# EAGLE board intelligent half bridge R3 with heatsink (EAGLE 5.10)
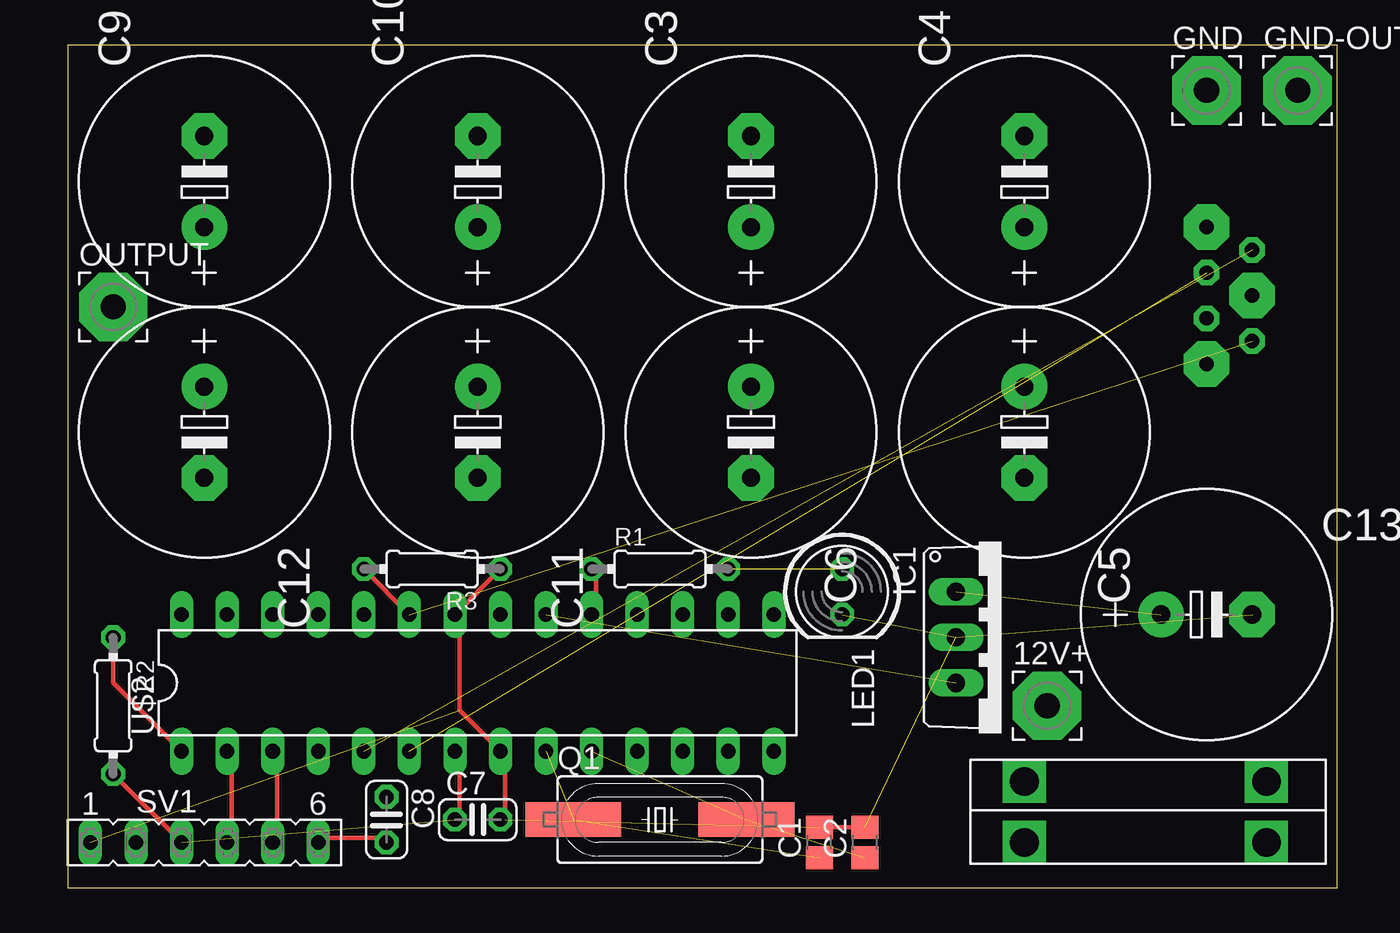
[diagram p0: board, top side]
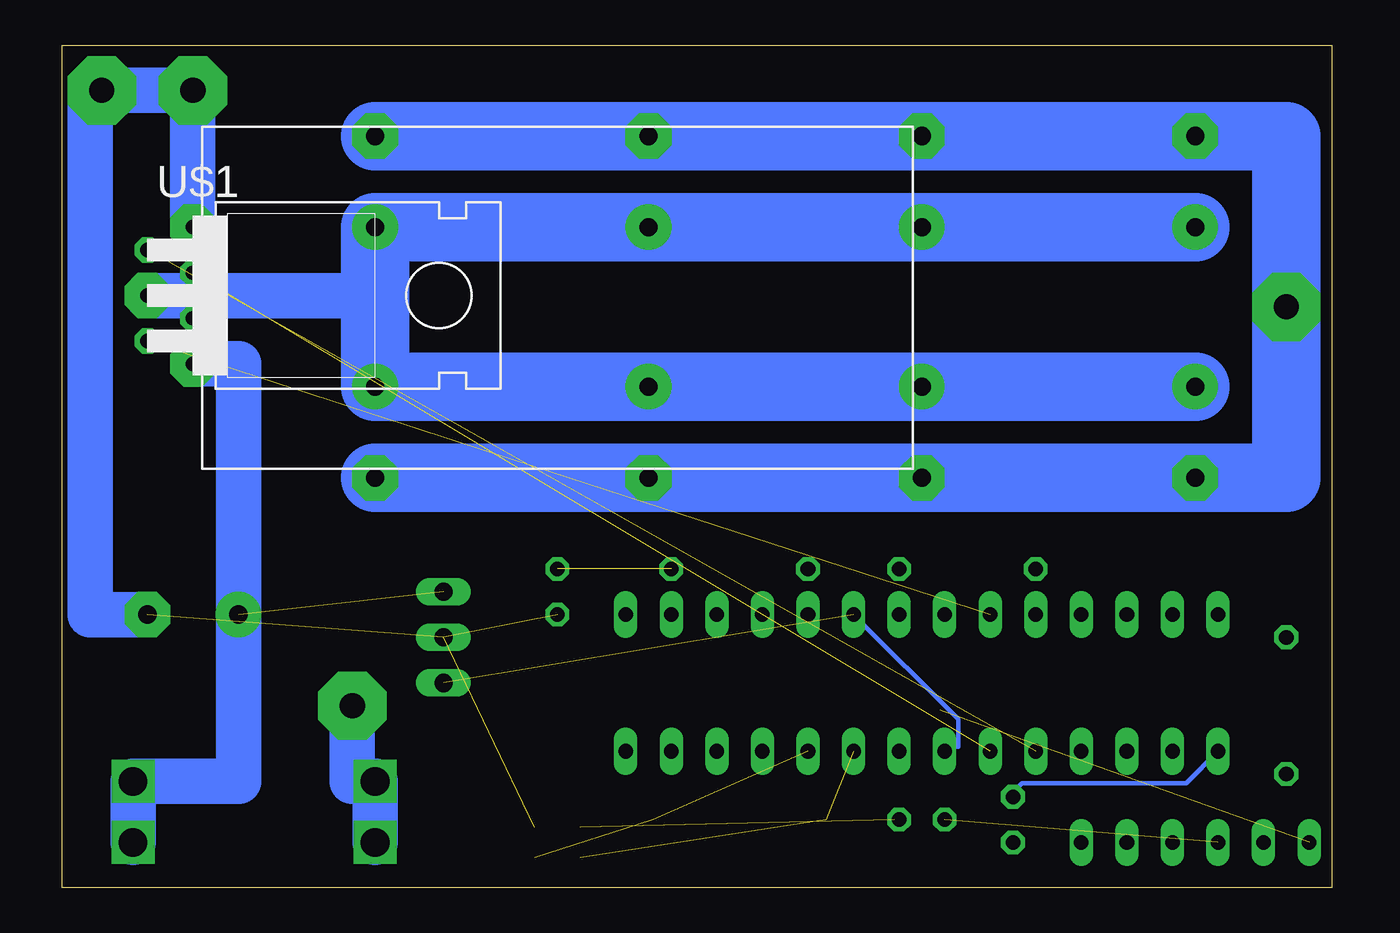
[diagram p1: board, bottom side, seen from below]

Size 70.79 x 46.98 mm. Coordinates in mm from the lower left corner, seen from the top.
Outline: 0,0 70.79,0 70.79,46.98 0,46.98 0,0
Copper layers (1*16): Top 0.035mm / dielectric 1.5mm / Bottom 0.035mm
Design rules "default": minimum track width 10mil, minimum drill 24mil, track to track 8mil, track to pad 8mil, pad to pad 8mil, via to via 8mil, smd to smd 8mil, copper to edge 40mil, drill to drill 8mil, minimum pad ring 10mil, minimum via ring 8mil, stop-mask expansion 4mil, vias tented up to drill 0mil, thermal gap 10mil

## Footprints (pad centres in the part's own frame; a part is rotated, then mirrored left to right if it is on the bottom)
3,81/1,4 = drill 1.397 pad 3.81 octagon: 1 0,0
C0805 = smd 1.3 x 1.5: 1 -0.85,0; 2 0.85,0
E5-13 = drill 1.016 pad 2.54 round: + -2.54,0 | drill 1.016 pad 2.54 octagon: - 2.54,0
C025-024X044 = drill 0.813 octagon: 1 -1.27,0; 2 1.27,0
2IN1_FUSEHOLDER = drill 1.6 square: 1 0,0; 2 0,3.4; 3 13.5,3.4; 4 13.5,0
TO220V = drill 1.016 long: 1 -2.54,-2.54; 2 0,-2.54; 3 2.54,-2.54
LED5MM = drill 0.813 octagon: A -1.27,0; K 1.27,0
HC49UP = smd 5.334 x 1.93: 1 -4.826,0; 2 4.826,0
0204/7 = drill 0.813 octagon: 1 -3.81,0; 2 3.81,0
FE06 = drill 0.813 long: 1 -6.35,0; 2 -3.81,0; 3 -1.27,0; 4 1.27,0; 5 3.81,0; 6 6.35,0
TO220-7-HS = drill 0.8 pad 2.54 octagon: 1 -3.81,-13.97; 4 0,-16.51; 7 3.81,-13.97 | drill 0.8 pad 1.422 octagon: 2 -2.54,-16.51; 3 -1.27,-13.97; 5 1.27,-13.97; 6 2.54,-16.51
DIL28-3 = drill 0.813 long: 1 -16.51,-3.81; 2 -13.97,-3.81; 3 -11.43,-3.81; 4 -8.89,-3.81; 5 -6.35,-3.81; 6 -3.81,-3.81; 7 -1.27,-3.81; 8 1.27,-3.81; 9 3.81,-3.81; 10 6.35,-3.81; 11 8.89,-3.81; 12 11.43,-3.81; 13 13.97,-3.81; 14 16.51,-3.81; 15 16.51,3.81; 16 13.97,3.81; 17 11.43,3.81; 18 8.89,3.81; 19 6.35,3.81; 20 3.81,3.81; 21 1.27,3.81; 22 -1.27,3.81; 23 -3.81,3.81; 24 -6.35,3.81; 25 -8.89,3.81; 26 -11.43,3.81; 27 -13.97,3.81; 28 -16.51,3.81

## Placement (x,y rotation side)
12V+  [3,81/1,4]  54.61,10.16 0 top
C1  22pF  [C0805]  41.91,2.54 90 top
C2  22pF  [C0805]  44.45,2.54 90 top
C3  [E5-13]  38.1,39.37 90 top
C4  [E5-13]  53.34,39.37 90 top
C5  [E5-13]  53.34,25.4 270 top
C6  [E5-13]  38.1,25.4 270 top
C7  0.1uF  [C025-024X044]  22.86,3.81 0 top
C8  0.1uF  [C025-024X044]  17.78,3.81 270 top
C9  [E5-13]  7.62,39.37 90 top
C10  [E5-13]  22.86,39.37 90 top
C11  [E5-13]  22.86,25.4 270 top
C12  [E5-13]  7.62,25.4 270 top
C13  [E5-13]  63.5,15.24 0 top
FUSE  2IN1FUSEHOLDER  [2IN1_FUSEHOLDER]  53.34,2.54 0 top
GND  [3,81/1,4]  63.5,44.45 0 top
GND-OUT  [3,81/1,4]  68.58,44.45 0 top
IC1  7805TV  [TO220V]  52.07,13.97 270 top
LED1  [LED5MM]  43.18,16.51 270 top
OUTPUT  [3,81/1,4]  2.54,32.38 0 top
Q1  [HC49UP]  33.02,3.81 0 top
R1  470  [0204/7]  33.02,17.78 0 top
R2  10K  [0204/7]  2.54,10.16 270 top
R3  470  [0204/7]  20.32,17.78 180 top
SV1  [FE06]  7.62,2.54 0 top
U$1  BTN7930SHS  [TO220-7-HS]  49.53,33.02 270 bottom
U$2  ARDUINO-MEGA328P  [DIL28-3]  22.86,11.43 0 top

## Library data of the parts
12V+ GND GND-OUT OUTPUT = wirepad
C1 C2 = resistor
C3-C13 R1-R3 = rcl
FUSE U$1 U$2 = custom
IC1 = linear
LED1 = led
Q1 = crystal
SV1 = con-lsta

## Nets
+5V: C7.1 IC1.3 R2.2 SV1.3 U$2.7 U$2.20
GND: C1.2 C2.2 C7.2 C13.- GND-OUT.1 GND.1 IC1.2 LED1.K R3.1 SV1.1 U$1.1 U$2.8 U$2.22
N$1: R3.2 U$1.6 U$2.23
N$2: 12V+.1 FUSE.1 FUSE.2
N$3: C8.2 SV1.6
N$4: C8.1 R2.1 U$2.1
N$5: C13.+ FUSE.3 FUSE.4 IC1.1 U$1.7
N$6: C2.1 Q1.2 U$2.10
N$7: C1.1 Q1.1 U$2.9
N$8: U$1.3 U$2.6
N$9: R1.1 U$2.19
N$10: LED1.A R1.2
N$12: C3.- C4.- C5.- C6.- C9.- C10.- C11.- C12.- OUTPUT.1
N$13: U$1.2 U$2.5
N$14: SV1.4 U$2.2
N$15: SV1.5 U$2.3
N$17: C3.+ C4.+ C5.+ C6.+ C9.+ C10.+ C11.+ C12.+ U$1.4

## Tracks (layer width: path | path; a pad name or v marks a point on that pad's centre or on a via)
+5V  (2 unrouted)
  Top 0.254: SV1.3 R2.2 | C7.1 21.84,3.81 21.84,7.37 U$2.7
  Bottom 0.254: U$2.20 20.83,9.4 20.83,7.87 21.34,7.87 U$2.7
GND  (5 unrouted)
  Top 0.254: C1.2 C2.2 | R3.1 U$2.22 21.84,14.99 21.84,9.91 U$2.8 24.38,7.37 24.38,3.81 C7.2
  Bottom 2.54: U$1.1 GND.1 GND-OUT.1 69.22,44.45 69.22,15.24 C13.-
N$1  (1 unrouted)
  Top 0.254: R3.2 U$2.23
N$2
  Bottom 2.54: FUSE.1 FUSE.2 54.61,5.94 12V+.1
N$3
  Top 0.254: SV1.6 14.22,2.79 17.78,2.79 C8.2
N$4
  Top 0.254: R2.1 2.54,11.43 U$2.1
  Bottom 0.254: C8.1 17.78,5.33 17.27,5.84 8.13,5.84 U$2.1
N$5  (1 unrouted)
  Bottom 2.54: U$1.7 60.96,29.21 C13.+ 60.96,5.94 FUSE.3 FUSE.4
N$6  (2 unrouted)
N$7  (2 unrouted)
N$8  (1 unrouted)
N$9
  Top 0.254: U$2.19 29.46,15.49 29.46,17.53 R1.1
N$10  (1 unrouted)
N$12
  Bottom 3.81: C4.- C3.- C10.- | C10.- C9.- 2.54,41.91 OUTPUT.1 2.54,22.86 C5.- C6.- C11.- C12.- | C10.- 15.24,41.91
N$13  (1 unrouted)
N$14
  Top 0.254: SV1.4 9.14,2.79 9.14,7.37 U$2.2
N$15
  Top 0.254: SV1.5 11.68,2.79 11.68,7.37 U$2.3
N$17
  Bottom 2.54: U$1.4 53.34,33.02 C4.+
  Bottom 3.81: C9.+ C10.+ C3.+ C4.+ C5.+ C6.+ C11.+ C12.+